# Altium PCB LaserPCBlayout.PcbDoc
Units mil, origin at the board's own origin, x right, y up, seen from the top; angles counter-clockwise.
Board outline 2362.2 x 3149.61 mil, 2 copper layers (Top Layer, Bottom Layer), stack 21 mil thick; 79 components, 72 nets, 325 pads, 211 vias.
Unrouted connection lines stored in the file: 73.
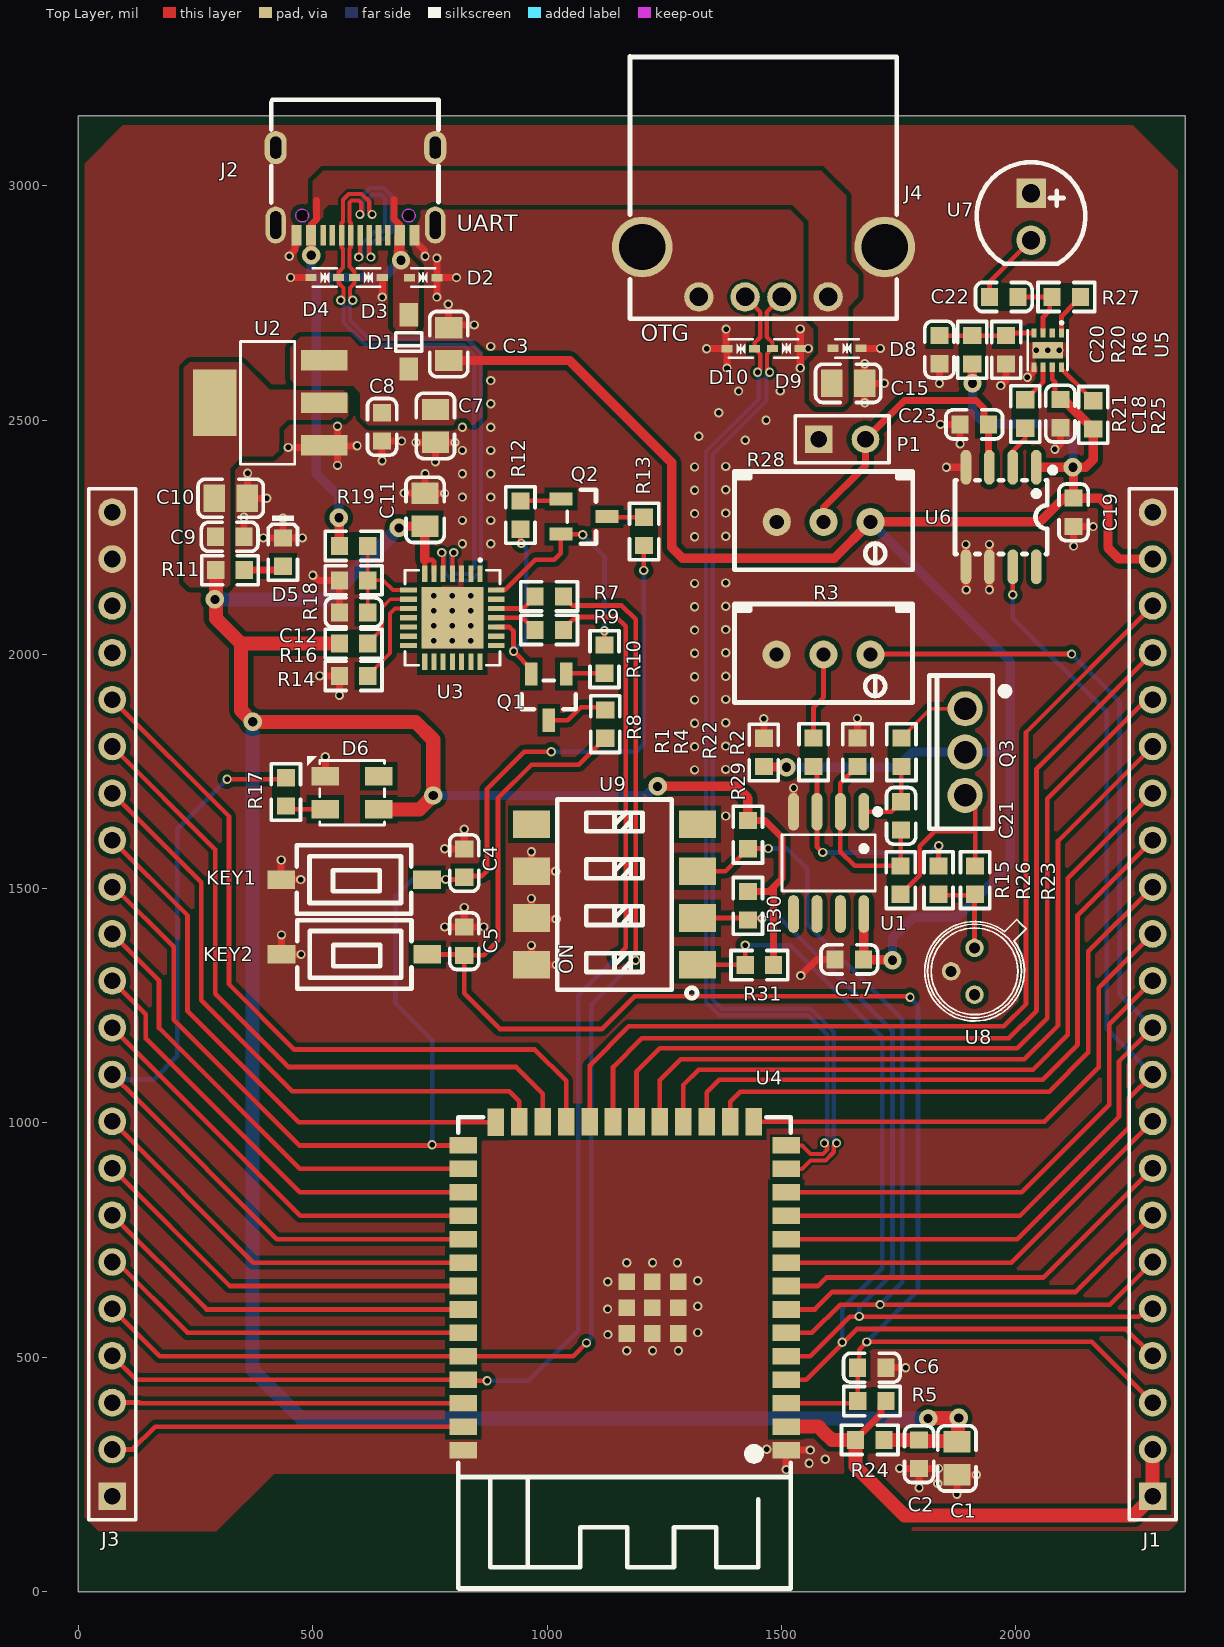
[diagram p0: Top Layer view]
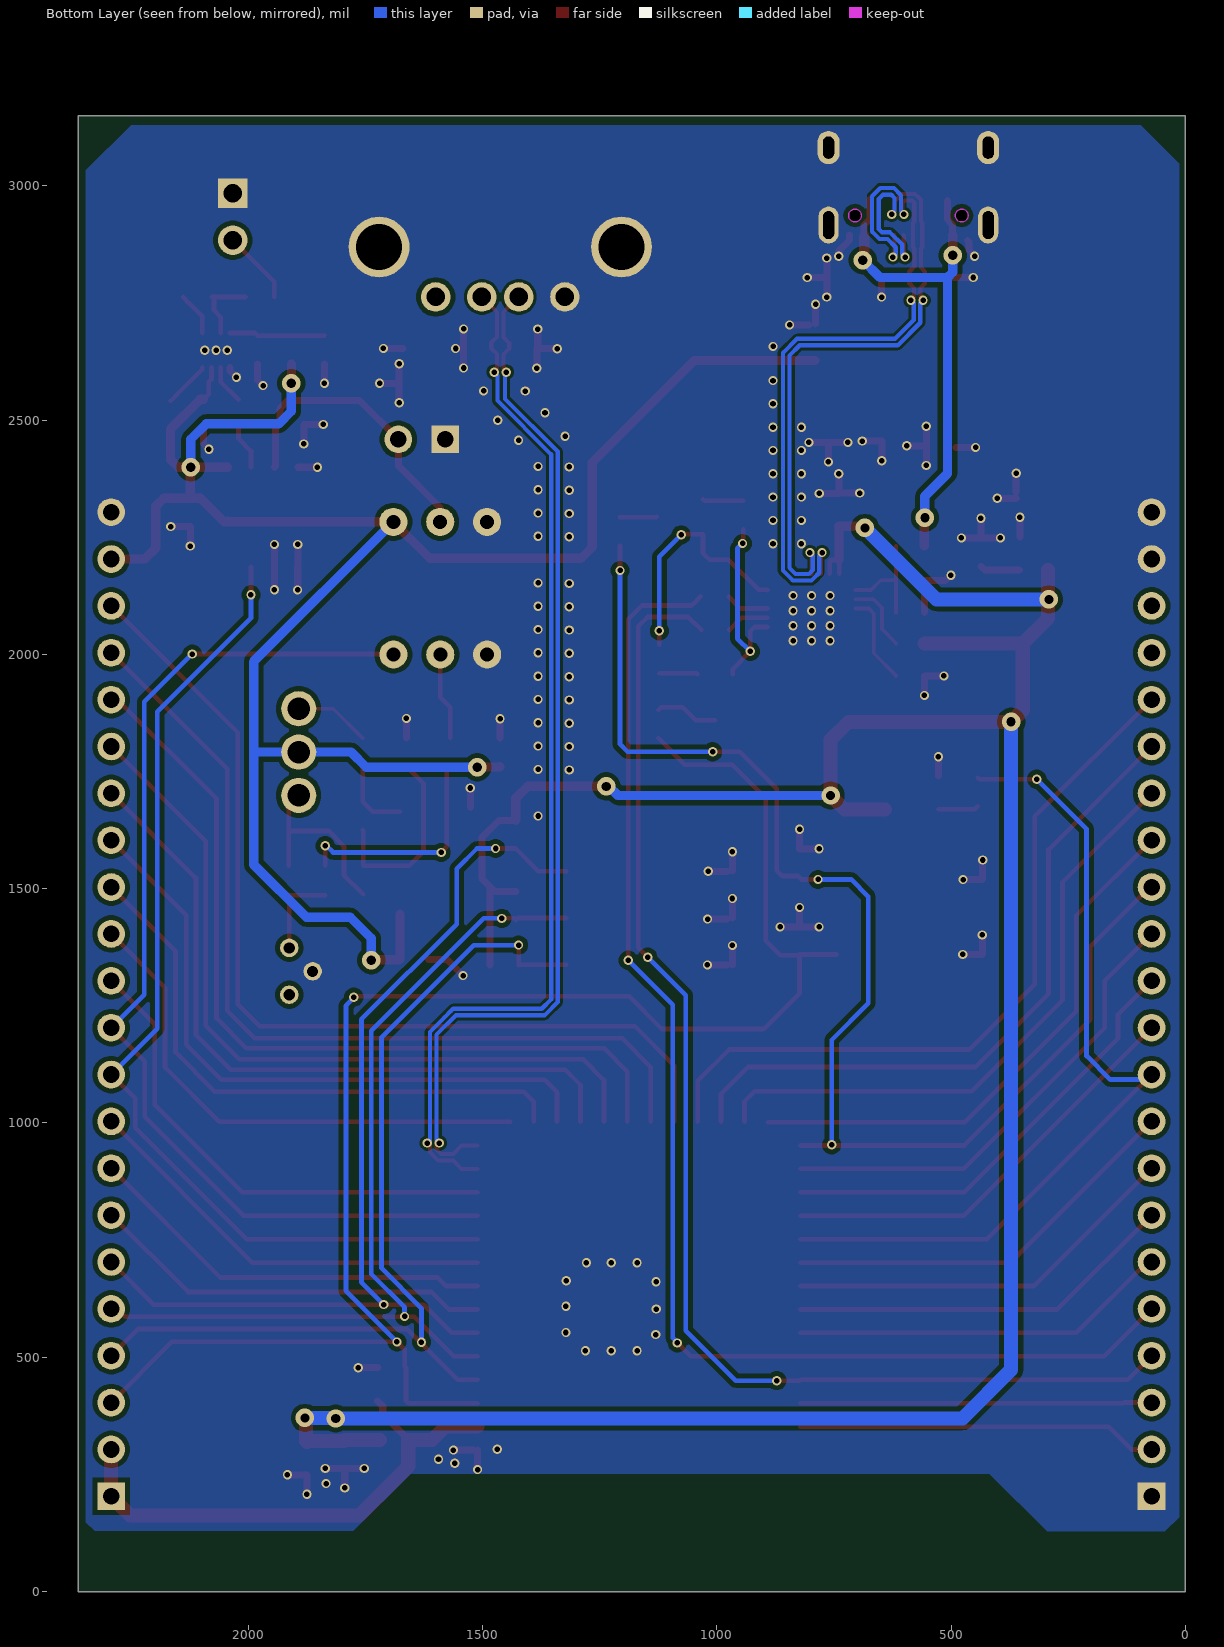
[diagram p1: Bottom Layer view, seen from below]
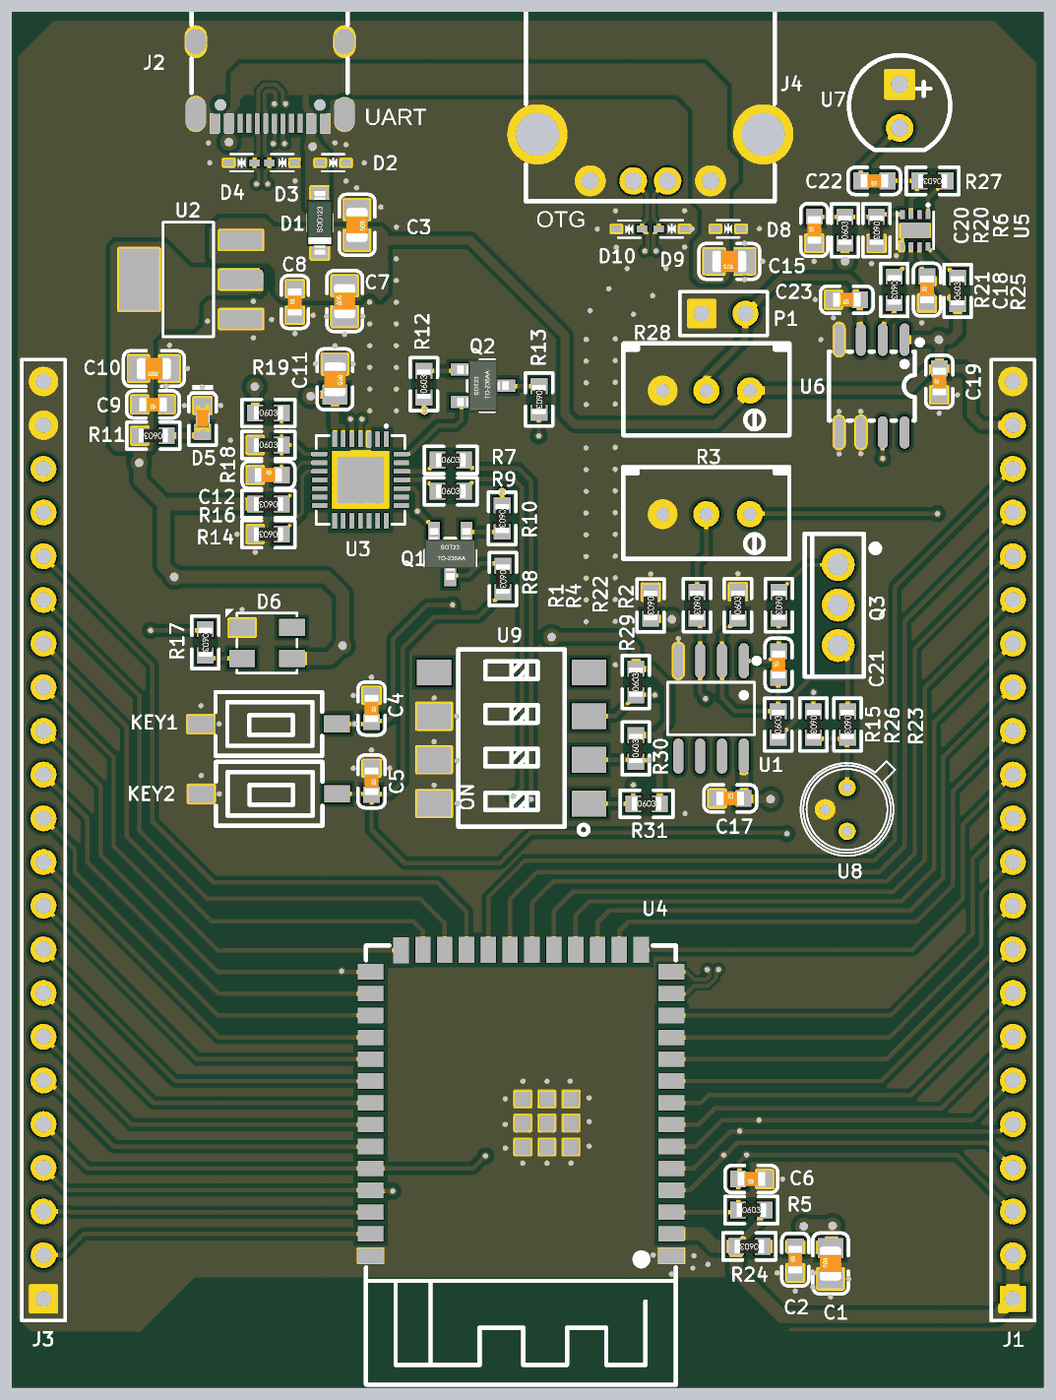
[diagram p2: 3D render of the assembled board from above, using the file's embedded part models]

## Layer stack, top to bottom
Top Solder: solder mask 0.4, Solder Resist, Dk 3.5
Top Layer: signal copper 1.4
Dielectric 2: prepreg 2.8, PP-006, Dk 4.1
Dielectric 1: dielectric 12.6, FR-4, Dk 4.8
Dielectric 3: prepreg 2.8, PP-006, Dk 4.1
Bottom Layer: signal copper 1.4
Bottom Solder: solder mask 0.4, Solder Resist, Dk 3.5

## Board outline
0,0 0,3149.61 2362.2,3149.61 2362.2,0

## Design rules (kind name [scope] priority, off if disabled: settings)
Clearance POLY [InPoly vs InNetClass('90OHM')] p1: gap=6 ignorepadtopadclearanceinfootprint=FALSE
Clearance POLY-ALL [InPoly] p2: gap=10 ignorepadtopadclearanceinfootprint=FALSE
Clearance [All] p3: gap=5 ignorepadtopadclearanceinfootprint=FALSE
ComponentClearance [All] p1: gap=0 collisioncheckmode=3 verticalgap=0 showdistances=FALSE
DiffPairsRouting [All] p1: maxlimit=5 minlimit=5 mostfreqgap=5 toplayer_minwidth=9 toplayer_maxwidth=9 toplayer_prefwidth=9 bottomlayer_minwidth=9 bottomlayer_maxwidth=9 bottomlayer_prefwidth=9 maxuncoupledlength=500
HoleSize [All] p1: absolutevalues=TRUE maxlimit=1000 minlimit=1 maxpercent=80.000 minpercent=20.000
HoleToHoleClearance [All] p1: gap=0 allowstackedmicrovias=TRUE
MinimumSolderMaskSliver [All] p1: minsoldermaskwidth=0
PlaneClearance [All] p1: clearance=15
PlaneConnect [All] p1: planeconnectstyle=Direct reliefexpansion=20 reliefentries=4 reliefconductorwidth=20 reliefairgap=10
PolygonConnect [All] p1: connectstyle=Direct reliefconductorwidth=20 reliefentries=4 polygonreliefangle="90 Angle" airgapwidth=10
RoutingVias [All] p1: holewidth=28 width=50 viastyle="Through Hole" minholewidth=28 minwidth=50 maxholewidth=28 maxwidth=50
SilkToSilkClearance [All] p1: silktosilkclearance=0
SilkToSolderMaskClearance [IsPad] p1: minsilkscreentomaskgap=0 clearancetoexposedcopper=TRUE
SolderMaskExpansion [All] p1: expansion=4 istentingtop=FALSE
SupplyNets "Schematic Supply Nets_12" [InNet('VBUS')] p1: voltage=0.000
SupplyNets "Schematic Supply Nets_11" [InNet('ESP_3V3')] p2: voltage=0.000
SupplyNets "Schematic Supply Nets_10" [InNet('VCC_3V3')] p3: voltage=0.000
SupplyNets "Schematic Supply Nets_9" [InNet('VCC_5V')] p4: voltage=0.000
SupplyNets "Schematic Supply Nets_4" [InNet('GND')] p5: voltage=0.000
Width [All] p1: maxlimit=1000 minlimit=6 preferedwidth=10
21 further rules are at their usual default settings.

## Classes and differential pairs
net class 90OHM: OTG_D_N OTG_D_P USB_D_N USB_D_P
differential pair class 90OHM: D_OTG_D_ D_USB_D_
differential pair D_USB_D_: +USB_D_P -USB_D_N
differential pair D_OTG_D_: +OTG_D_P -OTG_D_N
differential pair OTG_D: +OTG_D_P -OTG_D_N
differential pair USB_D: +USB_D_P -USB_D_N

## Components (designator, comment, footprint, x,y, rotation, side; value= is the part's Value field where it differs from the comment)
C1 "10uF/25V" 0805_C 1874.58,284.34 r90 top
C2 "0.1uF/50V" 0603_C 1793.89,293.22 r90 top
C3 "10uF/25V" 0805_C 790.33,2661.97 r270 top
C4 "0.1uF/50V" 0603_C 823.31,1554.61 r270 top
C5 "0.1uF/50V" 0603_C 823.31,1387.88 r270 top
C6 "1uF/16V" 0603_C 1693.06,477.72 r180 top
C7 "10uF/25V" 0805_C 761.8,2487.32 r90 top
C8 "0.1uF/50V" 0603_C 647.92,2485.26 r90 top
C9 "0.1uF/50V" 0603_C 322.78,2250.82 r180 top
C10 "10uF/25V" 0805_C 324.98,2332.96 r180 top
C11 "10uF/25V" 0805_C 739.63,2308.35 r270 top
C12 "1uF/16V" 0603_C 587.23,2089.42 r0 top
C15 "10uF/25V" 0805_C 1642.72,2578.3 r180 top
C17 "0.1uF/50V" 0603_C 1644.96,1349.03 r0 top
C18 "0.1uF/50V" 0603_C 2095.3,2513.65 r90 top
C19 "0.1uF/50V" 0603_C 2123.44,2302.92 r90 top
C20 "100pF/50V" 0603_C 1837.2,2650.22 r90 top
C21 "1pF/50V" 0603_C 1755.55,1655.26 r90 top
C22 "100pF/50V" 0603_C 1974.63,2762.47 r180 top
C23 "0.1uF/50V" 0603_C 1911.56,2490.53 r180 top
D1 "1N5819HW-7-F" SOD-123 704.93,2666.47 r90 top
D2 "LESD5D5.0CT1G-ES" SOD-523_L1.2-W0.8-LS1.6-BI 735.6,2803.93 r180 top
D3 "LESD5D5.0CT1G-ES" SOD-523_L1.2-W0.8-LS1.6-BI 618.91,2804.09 r180 top
D4 "LESD5D5.0CT1G-ES" SOD-523_L1.2-W0.8-LS1.6-BI 525.9,2804.09 r0 top
D5 "红灯 0603" 0603_LED_S1 436.35,2218.18 r270 top
D6 "SK6812MINI-HS" LED-SMD_4P-L3.5-W3.5-BR_SK6812MINI-HS 584.05,1704.55 r180 top
D8 "LESD5D5.0CT1G-ES" SOD-523_L1.2-W0.8-LS1.6-BI 1640.11,2652.78 r180 top
D9 "LESD5D5.0CT1G-ES" SOD-523_L1.2-W0.8-LS1.6-BI 1510.75,2652.69 r180 top
D10 "LESD5D5.0CT1G-ES" SOD-523_L1.2-W0.8-LS1.6-BI 1413.51,2652.23 r0 top
J1 "Header 22" HDR1X22 2292.19,203.33 r90 top
J2 "TYPE-C 16PIN 2MD(073)" USB-C-SMD_TYPE-C-6PIN-2MD-073 591.19,2987.73 r180 top locked
J3 "Header 22" HDR1X22 72.2,203.33 r90 top
J4 "USB-231-ARY" USB-A-TH_USB-231-ARY 1461.9,2815.87 r180 top locked
KEY1 "KEY" SW-smt 591.22,1516.27 r180 top
KEY2 "KEY" SW-smt 591.9,1356.38 r180 top
P1 "Header 2" HDR1X2 1579.51,2458.82 r0 top
Q1 "L8050QLT1G" SOT-23(SOT-23-3) 1003.66,1908.58 r90 top
Q2 "L8050QLT1G" SOT-23(SOT-23-3) 1078.72,2293.75 r180 top
Q3 "BD139" TO-126_L7.5-W2.5-P2.3-B 1892.04,1791.45 r180 top
R1 "330R" 0603_R 1462.52,1790.68 r270 top
R2 "68R" 0603_R 1756.01,1791.13 r270 top
R3 "1kΩ" RES-ADJ-TH_3296W 1589.97,1999.59 r270 top
R4 "100K/1%" 0603_R 1568.7,1791.13 r270 top
R5 "10K" 0603_R 1693.28,406.41 r0 top
R6 "13K/1%" 0603_R 1979.76,2649.65 r270 top
R7 "0R" 0603_R 1004.62,2123.51 r0 top
R8 "0R" 0603_R 1124.28,1851.12 r270 top
R9 "0R" 0603_R 1004.62,2052.01 r0 top
R10 "10K/1%" 0603_R 1122.57,1989.8 r270 top
R11 "5.1K" 0603_R 323.53,2179.55 r180 top
R12 "10K/1%" 0603_R 943.29,2297.15 r90 top
R13 "0R" 0603_R 1206.94,2262.22 r270 top
R14 "10K/1%/NC" 0603_R 587.23,1953.9 r180 top
R15 "10K/1%" 0603_R 1754.65,1518.2 r90 top
R16 "1K/1%" 0603_R 587.23,2022.7 r180 top
R17 "0R" 0603_R 442.84,1706.31 r270 top
R18 "47.5K/1%" 0603_R 587.23,2157.9 r0 top
R19 "22.1K/1%" 0603_R 587.23,2231.21 r0 top
R20 "43K/1%" 0603_R 1907.36,2649.65 r90 top
R21 "1K/1%" 0603_R 2020.44,2512.73 r270 top
R22 "100K/1%" 0603_R 1662.35,1791.13 r90 top
R23 "25R" 0603_R 1913.47,1518.2 r270 top
R24 "0R" 0603_R 1688.64,323.53 r180 top
R25 "10K/1%" 0603_R 2165.57,2510.9 r90 top
R26 "10K/1%" 0603_R 1835.27,1518.2 r270 top
R27 "10K/1%" 0603_R 2108.17,2762.43 r180 top
R28 "1kΩ" RES-ADJ-TH_3296W 1590.2,2282.63 r270 top
R29 "10K/1%" 0603_R 1428.6,1615.34 r90 top
R30 "10K/1%" 0603_R 1428.6,1463.42 r90 top
R31 "10K/1%" 0603_R 1453.16,1336.72 r0 top
U1 "OPA2350UA/2K5" SOIC-8_L4.9-W3.9-P1.27-LS6.0-BL 1600.95,1554.96 r180 top
U2 "SGM2212-3.3XKC3G/TR" SOT-223-3_L6.5-W3.4-P2.30-LS7.0-BR 407.79,2536.72 r0 top
U3 "CP2102N-A02-GQFN28R" QFN-28_L5.0-W5.0-P0.50-TL-EP3.3 798.03,2078.03 r270 top
U4 "ESP32-S3-WROOM-1-N16R8" WIRELM-SMD_ESP32-S3-WROOM-1 1165.83,652.23 r180 top locked
U5 "OPA855IDSGR" DFN-8_L2.0-W2.0-P0.50-BL-EP 2068.29,2649.03 r180 top
U6 "LT1016CS8#TRPBF" SO-8_L4.9-W3.9-P1.27-LS5.9-BL 1968.95,2292.91 r180 top
U7 "SFH 213" LED-TH_BD5.8-P2.54-RD 2032.73,2933.74 r270 top
U8 "OPV300" OPV300 1912.23,1324.14 r0 top
U9 "BX-DS2.54-4PTP" SW-SMD_8P-L10.3-W6.2-P2.54-LS9.5-BL 1143.88,1487.27 r90 top

## Footprints (in the part's own frame and the unit in brackets; to place one, negate y for a bottom-side part, rotate by r counter-clockwise, add the part's x,y. Pads: shape width x height; smd on the part's side, far side on the other; paste and mask are expansions set on the pad)
0603_C [mm]
  rect 0.93x0.98 smd: 1(-0.77,0) 2(0.77,0)
  silkscreen extent -1.53,-0.79 1.54,0.79, body extent -0.8,-0.4 0.8,0.4, height 0.3
0603_LED_S1 [mm]
  rect 0.93x0.98 smd: A(0.77,0) K(-0.77,0)
  silkscreen extent -1.98,-0.79 1.54,0.79, body extent -0.8,-0.4 0.8,0.4, height 0.6
0603_R [mm]
  rect 0.93x0.98 smd: 1(-0.77,0) 2(0.77,0)
  silkscreen extent -1.53,-0.79 1.54,0.79, body extent -0.85,-0.4 0.85,0.4, height 0.56
0805_C [mm]
  rect 1.16x1.47 smd: 1(-0.89,0) 2(0.89,0)
  silkscreen extent -1.77,-1.04 1.77,1.04, body extent -1,-0.62 1,0.63, height 0.77
DFN-8_L2.0-W2.0-P0.50-BL-EP [mm]
  rect 0.28x0.505 smd: 1(-0.75,-0.928) 2(-0.25,-0.928) 3(0.25,-0.928) 4(0.75,-0.928) 5(0.75,0.928) 6(0.25,0.928) 7(-0.25,0.928) 8(-0.75,0.928)
  rect 1.65x0.9 smd: 9(0,0)
  silkscreen extent -1.08,-1.55 1.08,1.08
HDR1X2 [mm] "Connector; Header; 2 Position"
  rect 1.5x1.5 hole 0.9: 1(0,0)
  round 1.5 hole 0.9: 2(2.54,0)
  silkscreen extent -1.27,-1.27 3.81,1.27
HDR1X22 [mm] "Connector; Header; 22 Position"
  rect 1.5x1.5 hole 0.9: 1(0,0)
  round 1.5 hole 0.9: 2(2.54,0) 3(5.08,0) 4(7.62,0) 5(10.16,0) 6(12.7,0) 7(15.24,0) 8(17.78,0) 9(20.32,0) 10(22.86,0) 11(25.4,0) 12(27.94,0) 13(30.48,0) 14(33.02,0) 15(35.56,0) 16(38.1,0) 17(40.64,0) 18(43.18,0) 19(45.72,0) 20(48.26,0) 21(50.8,0) 22(53.34,0)
  silkscreen extent -1.27,-1.27 54.61,1.27
LED-SMD_4P-L3.5-W3.5-BR_SK6812MINI-HS [mm]
  rect 1.5x1 smd: 1(1.45,-0.9) 2(1.45,0.9) 3(-1.45,0.9) 4(-1.45,-0.9)
  silkscreen extent -1.75,-1.97 2.42,1.75
LED-TH_BD5.8-P2.54-RD [mm]
  round 1.6 hole 1: 1(1.27,0)
  rect 1.6x1.6 hole 1: 2(-1.27,0)
  silkscreen extent -2.96,-2.95 2.54,2.94
OPV300 [mm]
  round 1 hole 0.6: 1(0,1.257) 2(-1.27,-0.013) 3(0,-1.283)
  silkscreen extent -2.7,-2.71 2.79,2.79
QFN-28_L5.0-W5.0-P0.50-TL-EP3.3 [mm]
  rect 0.905x0.28 smd paste-100 mask+0.051: 1(-2.377,1.5) 2(-2.377,1) 3(-2.377,0.5) 4(-2.377,0) 5(-2.377,-0.5) 6(-2.377,-1) 7(-2.377,-1.5) 15(2.377,-1.5) 16(2.377,-1) 17(2.377,-0.5) 18(2.377,0) 19(2.377,0.5) 20(2.377,1) 21(2.377,1.5)
  rect 0.28x0.905 smd paste-100 mask+0.051: 8(-1.5,-2.377) 9(-1,-2.377) 10(-0.5,-2.377) 11(0,-2.377) 12(0.5,-2.377) 13(1,-2.377) 14(1.5,-2.377) 22(1.5,2.377) 23(1,2.377) 24(0.5,2.377) 25(0,2.377) 26(-0.5,2.377) 27(-1,2.377) 28(-1.5,2.377)
  rect 3.35x3.35 smd paste-100 mask+0.051: 29(0,0)
  silkscreen extent -3.2,-2.58 2.58,2.58
RES-ADJ-TH_3296W [mil]
  round 60 hole 30: 1(0,100.01) 2(0,0.01) 3(0,-99.99)
  silkscreen extent -108,-190 102,190
SO-8_L4.9-W3.9-P1.27-LS5.9-BL [mil]
  oval 22.6x74.33 smd: 1(-75,-106.26) 2(-25,-106.26) 3(25,-106.26) 4(75,-106.26) 5(75,106.26) 6(25,106.26) 7(-25,106.26) 8(-75,106.26)
  silkscreen extent -116,-106 98,79
SOD-123 [mm]
  rect 1.25x1 smd: 1(1.475,0) 2(-1.475,0)
  silkscreen extent -0.5,-0.7 0.5,0.7, body extent -1.85,-0.77 1.85,0.78, height 1.35
SOD-523_L1.2-W0.8-LS1.6-BI [mm]
  rect 0.6x0.4 smd: 1(-0.75,0) 2(0.75,0)
  silkscreen extent -0.65,-0.5 0.65,0.5
SOIC-8_L4.9-W3.9-P1.27-LS6.0-BL [mm]
  oval 0.588x2.045 smd: 1(-1.905,-2.772) 2(-0.635,-2.772) 3(0.635,-2.772) 4(1.905,-2.772) 5(1.905,2.772) 6(0.635,2.772) 7(-0.635,2.772) 8(-1.905,2.772)
  silkscreen extent -2.8,-2.92 2.53,1.52
SOT-23(SOT-23-3) [mm]
  rect 1.25x0.7 smd: 1(1.25,-0.95) 2(1.25,0.95) 3(-1.25,0)
  silkscreen extent -0.65,-1.46 0.9,1.46, body extent -1.5,-1.5 1.5,1.5, height 1.3
SOT-223-3_L6.5-W3.4-P2.30-LS7.0-BR [mm]
  rect 2.5x1.1 smd: 1(2.97,-2.3) 2(2.97,0) 3(2.97,2.3)
  rect 2.34x3.6 smd: 4(-2.97,0)
  silkscreen extent -1.57,-3.33 1.37,3.33
SW-SMD_8P-L10.3-W6.2-P2.54-LS9.5-BL [mm]
  rect 1.5x2 smd: 1(-3.81,-4.5) 2(-1.27,-4.5) 3(1.27,-4.5) 4(3.81,-4.5) 5(3.81,4.5) 6(1.27,4.5) 7(-1.27,4.5) 8(-3.81,4.5)
  silkscreen extent -5.62,-4.47 5.15,3.1
SW-smt [mm] "TS-1007S-26"
  rect 1.5x1 smd: 1(-3.873,-0.08) 2(4.027,-0.08)
  silkscreen extent -3.02,-1.93 3.18,1.77
TO-126_L7.5-W2.5-P2.3-B [mil]
  round 75 hole 48: 1(0,-92.52) 2(0,0) 3(0,92.52)
  silkscreen extent -93,-163 77,163
USB-A-TH_USB-231-ARY [mm]
  round 1.6 hole 1: 1(-3.5,1.355) 2(-1,1.355) 3(1,1.355) 4(3.5,1.355)
  round 3.3 hole 2.5: 5(-6.57,-1.355) 6(6.57,-1.355)
  silkscreen extent -7.23,-11.68 7.24,2.54
USB-C-SMD_TYPE-C-6PIN-2MD-073 [mm]
  rect 0.55x1.1 smd paste-100 mask+0.05: 1(-3.2,2.375) 2(-2.4,2.375) 11(2.4,2.375) 12(3.2,2.375)
  rect 0.3x1.1 smd paste-100 mask+0.05: 3(-1.75,2.375) 4(-1.25,2.375) 5(-0.75,2.375) 6(-0.25,2.375) 7(0.25,2.375) 8(0.75,2.375) 9(1.25,2.375) 10(1.75,2.375)
  oval 1.2x1.8 hole 0.6 slot 1.2 at 90 deg paste-2539.97 mask+0.05: 13(-4.325,-2.375) 14(4.325,-2.375)
  oval 1.1x2 hole 0.6 slot 1.5 at 90 deg paste-2539.97 mask+0.05: 13(-4.325,1.825) 14(4.325,1.825)
  Keep-Out Layer board cut-out: -2.54,1.305 -2.575,1.153 -2.672,1.031 -2.812,0.964 -2.968,0.964 -3.108,1.031 -3.205,1.153 -3.24,1.305 -3.24,1.305 -3.205,1.457 -3.108,1.579 -2.968,1.646 -2.812,1.646 -2.672,1.579 -2.575,1.457 -2.54,1.305
  Keep-Out Layer board cut-out: 3.24,1.305 3.205,1.153 3.108,1.031 2.968,0.964 2.812,0.964 2.672,1.031 2.575,1.153 2.54,1.305 2.54,1.305 2.575,1.457 2.672,1.579 2.812,1.646 2.968,1.646 3.108,1.579 3.205,1.457 3.24,1.305
  Keep-Out Layer circle w0.025: c-2.89,1.305 r0.35
  Keep-Out Layer circle w0.025: c2.89,1.305 r0.35
  Keep-Out Layer region: -2.54,1.305 -2.575,1.153 -2.672,1.031 -2.812,0.964 -2.968,0.964 -3.108,1.031 -3.205,1.153 -3.24,1.305 -3.24,1.305 -3.205,1.457 -3.108,1.579 -2.968,1.646 -2.812,1.646 -2.672,1.579 -2.575,1.457 -2.54,1.305
  Keep-Out Layer region: 3.24,1.305 3.205,1.153 3.108,1.031 2.968,0.964 2.812,0.964 2.672,1.031 2.575,1.153 2.54,1.305 2.54,1.305 2.575,1.457 2.672,1.579 2.812,1.646 2.968,1.646 3.108,1.579 3.205,1.457 3.24,1.305
  silkscreen extent -4.5,-4.97 4.57,0.6
WIRELM-SMD_ESP32-S3-WROOM-1 [mm]
  rect 1.5x0.9 smd paste+0 mask+0.05: 1(-8.75,8.895) 2(-8.75,7.625) 3(-8.75,6.355) 4(-8.75,5.085) 5(-8.75,3.815) 6(-8.75,2.545) 7(-8.75,1.275) 8(-8.75,0.005) 9(-8.75,-1.265) 10(-8.75,-2.535) 11(-8.75,-3.805) 12(-8.75,-5.075) 13(-8.75,-6.345) 14(-8.75,-7.615) 27(8.75,-7.615) 28(8.75,-6.345) 29(8.75,-5.075) 30(8.75,-3.805) 31(8.75,-2.535) 32(8.75,-1.265) 33(8.75,0.005) 34(8.75,1.275) 35(8.75,2.545) 36(8.75,3.815) 37(8.75,5.085) 38(8.75,6.355) 39(8.75,7.625) 40(8.75,8.895)
  rect 0.9x1.5 smd paste+0 mask+0.05: 15(-6.985,-8.895) 16(-5.715,-8.895) 17(-4.445,-8.895) 18(-3.175,-8.895) 19(-1.905,-8.895) 20(-0.635,-8.895) 21(0.635,-8.895) 22(1.905,-8.895) 23(3.175,-8.895) 24(4.445,-8.895) 25(5.715,-8.895) 26(6.985,-8.865)
  rect 0.9x0.9 smd: 41(-2.9,2.575) 41(-2.9,-0.225) 41(-2.9,1.175) 41(-1.5,2.575) 41(-1.5,1.175) 41(-1.5,-0.225) 41(-0.1,2.575) 41(-0.1,1.175) 41(-0.1,-0.225)
  silkscreen extent -9,-9.14 9.02,16.39

## Part data
C1 C3 C7 C10 C11 C15: library part "0805 2.0pF (2R0) 0.25pF 50V", "贴片电容", Package=0805, SuppliersPartNumber=C1800, ComponentLink1Description=供应商链接, ComponentLink1URL=http://www.szlcsc.com/product/details_2152.html, Supplier=LC
C2 C4 C5 C6 C8 C9 C12 C17 C18 C19 C20 C21 C22 C23: library part "0603 8.2nF (822) 10% 50V", "贴片电容", Package=0603, SuppliersPartNumber=C27920, ComponentLink1Description=供应商链接, ComponentLink1URL=http://www.szlcsc.com/product/details_28670.html, Supplier=LC
D1: library part 1SS314, "射频开关二极管"
D2 D3 D4 D8 D9 D10: Breakdown Voltage=5.8V, JLCPCB Part Class="Extended Part", LCSC Part Name=普容5.0V，单路双向ESD静电防护器件，30kV，CJ：12pF；音频/视频/通讯防护, Manufacturer=ElecSuper(静芯微), Maximum Clamping Voltage=10V, Operating Temperature=-, Peak Pulse Current (Ipp)=8A, Peak Pulse Power Dissipation (Ppp)=80W, Reverse Leakage Current (Ir)=1uA, Reverse Stand-Off Voltage (Vrwm)=5V, Add into BOM=yes, Convert to PCB=yes, Datasheet=https://atta.szlcsc.com/upload/public/pdf/source/20240905/10776531C4DE5F6ADA679023752259EC.pdf, Device=LESD5D5.0CT1G-ES, Manufacturer Part=LESD5D5.0CT1G-ES, Number of Lines=单路, polarity=双向, Supplier=LCSC, Supplier Footprint=SOD523, Supplier Part=C5199159, Symbol=LESD5D5.0CT1G-ES, Type=ESD
D5: library part "0603 红灯", "发光二极管", Package=0603, SuppliersPartNumber=C2286, ComponentLink1Description=供应商链接, ComponentLink1URL=http://www.szlcsc.com/product/details_2659.html, Supplier=LC
D6: ESD Withstand Voltage=2000V, Fixed-Frequency Pwm Mode=1kHz, JLCPCB Part Class="Extended Part", Lens Color=半透明透镜, Manufacturer=欧思科光电, Operating Temperature=-40℃~+85℃, Quiescent Current=0.6mA, Voltage - Supply=3.7V~5.5V, Add into BOM=yes, Convert to PCB=yes, Data Transmission Rate=800Kbit/s, Datasheet=https://item.szlcsc.com/datasheet/SK6812MINI-HS/3234155.html, Device=SK6812MINI-HS, Height=3.5mm, LCSC Part Name=SK6812MINI-HS, Length=3.7mm, Luminous Intensity=R:200mcd~385mcd；B:160mcd~320mcd；G:815mcd~1275mcd, Manufacturer Part=SK6812MINI-HS, Supplier=LCSC, Supplier Footprint=SMD,3.5x3.7mm, Supplier Part=C2922787, Symbol=SK6812MINI-HS, Viewing Angle=120°, Wavelength=R:620nm~625nm；B:465nm~475nm；G:520nm~530nm, Width=1.95mm
J1 J3: "Header, 22-Pin", LatestRevisionDate=17-Jul-2002, LatestRevisionNote="Re-released for DXP Platform.", Publisher="Altium Limited"
J2: Current Rating-Power=3A, Detection color=黑色, JLCPCB Part Class="Extended Part", LCSC Part Name="Type-C 母 卧贴", Manufacturer="SHOU HAN(首韩)", Operating Temperature=-25℃~+85℃, Voltage Rating=5V, Add into BOM=yes, Center Height=-, Connect-Disconnect Life=5千次, Connector Type=Type-C, Convert to PCB=yes, Datasheet=https://item.szlcsc.com/datasheet/TYPE-C%252016PIN%25202MD(073)/2901843.html, Device="TYPE-C 16PIN 2MD(073)", Gender=母, Length=-, Manufacturer Part="TYPE-C 16PIN 2MD(073)", Mounting Type=卧贴, Number of Contacts=16P, Number of Ports=1, Protocol Standard=-, Supplementary Features=-, Supplier=LCSC, Supplier Footprint=SMD, Supplier Part=C2765186, Symbol="TYPE-C 16PIN 2MD(073)"
J4: Current Rating-Power=1.5A, Detection color=白色, JLCPCB Part Class="Extended Part", LCSC Part Name="Type-A 母 弯插", Manufacturer=XUNPU(讯普), Operating Temperature=-20℃~+70℃, Voltage Rating=30V, Add into BOM=yes, Connector Type=Type-A, Convert to PCB=yes, Datasheet=https://item.szlcsc.com/datasheet/USB-231-ARY/763532.html, Device=USB-231-ARY, Gender=母, Length=14.2mm, Manufacturer Part=USB-231-ARY, Mounting Type=弯插, Number of Contacts=4P, Number of Ports=1, Protocol Standard="USB 2.0", Supplier=LCSC, Supplier Footprint=弯插, Supplier Part=C720525, Symbol=USB-231-ARY
KEY1 KEY2: library part keysmt
P1: "Header, 2-Pin", LatestRevisionDate=17-Jul-2002, LatestRevisionNote="Re-released for DXP Platform.", Publisher="Altium Limited"
Q1 Q2: library part "SOT-23 MMBT5551  G1", "三极管", Package=SOT-23, SuppliersPartNumber=C2145, ComponentLink1Description=供应商链接, ComponentLink1URL=http://www.szlcsc.com/product/details_2502.html, Supplier=LC
Q3: Collector - Emitter Voltage VCEO=80V, Current - Collector Cutoff=10uA, Current - Collector(Ic)=1.5A, DC Current Gain=63@150mA,2V, Emitter-Base Voltage(Vebo)=5V, JLCPCB Part Class="Extended Part", LCSC Part Name="NPN 电流:1.5A 电压:80V", Manufacturer=ST(意法半导体), Operating Temperature=-65℃~+150℃, Pd - Power Dissipation=12.5W, Add into BOM=yes, Convert to PCB=yes, Datasheet=https://item.szlcsc.com/datasheet/BD139/28616.html, Device=BD139, Manufacturer Part=BD139, Number=1个NPN, Supplier=LCSC, Supplier Footprint=TO-126, Supplier Part=C27866, Symbol=BD139, Type=NPN, Vce Saturation(VCE(sat))=500mV@0.5A,0.05A
R1 R2 R4 R5 R6 R7 R8 R9 R10 R11 R12 R13 R14 R15 R16 R17 R18 R19 R20 R21 R22 R23 R24 R25 R26 R27 R29 R30 R31: library part "0603 1KΩ (1001) 1%", "贴片电阻", Package=0603, SuppliersPartNumber=C21190, ComponentLink1Description=供应商链接, ComponentLink1URL=http://www.szlcsc.com/product/details_21904.html, Supplier=LC
R3 R28: library part 3296W-1-102LF, JLCPCB Part Class="Extended Part", LCSC Part Name="1kΩ ±10%", Manufacturer=BOURNS, Power(Watts)=500mW, Temperature Coefficient=±100ppm/℃, Tolerance=±10%, Add into BOM=yes, Convert to PCB=yes, Datasheet=https://item.szlcsc.com/datasheet/3296W-1-102LF/58119.html, Device=3296W-1-102LF, Manufacturer Part=3296W-1-102LF, Number of Turns=25, Supplier=LCSC, Supplier Footprint=SIP-3P,9.5x4.8mm, Supplier Part=C57089, Symbol=3296W-1-102LF
U1: Ib - Input Bias Current=0.5pA, JLCPCB Part Class="Extended Part", Manufacturer=TI(德州仪器), Operating Temperature=-40℃~+85℃, Output Current=40mA, Quiescent Current per Amplifier=5.2mA, Voltage - Supply=2.5V~5.5V, Add into BOM=yes, Convert to PCB=yes, Datasheet=https://www.ti.com/cn/lit/gpn/opa2350, Device=OPA2350UA/2K5, Gain Bandwidth Product=38MHz, LCSC Part Name=OPA2350UA/2K5, Manufacturer Part=OPA2350UA/2K5, Number of Channels=双路, Output Type=-, Rail to Rail=-, Slew Rate=22V/us, Supplier=LCSC, Supplier Footprint=SOIC-8, Supplier Part=C55904, Symbol=OPA2350UA/2K5
U2: library part SGM2212-3.3XKC3G/TR_C3294699, JLCPCB Part Class="Extended Part", Manufacturer=SGMICRO(圣邦微), Operating Temperature=-40℃~+125℃, Output Current=800mA, Output Voltage=3.3V, Power Supply Rejection Ratio (PSRR)=80dB@(120Hz), standby current=80uA, Voltage - Supply=20V, Voltage Dropout=450mV@(800mA), Add into BOM=yes, Convert to PCB=yes, Datasheet=https://item.szlcsc.com/datasheet/SGM2212-3.3XKC3G%252FTR/3859121.html, Device=SGM2212-3.3XKC3G/TR_C3294699, Features=短路保护；热关断, LCSC Part Name=SGM2212-3.3XKC3G/TR, Manufacturer Part=SGM2212-3.3XKC3G/TR, Noise=0.002%Vout, Output Type=固定, Supplier=LCSC, Supplier Footprint=SOT-223-3, Supplier Part=C3294699, Symbol=SGM2212-3.3XKC3G/TR_C3294699
U3: Current - Supply=9.5mA, JLCPCB Part Class="Extended Part", Manufacturer="SKYWORKS/SILICON LABS(芯科)", Operating Temperature=-40℃~+85℃@(Ta), Supply Current (Iq)=1.3uA, Voltage - Supply=3V~3.6V, Add into BOM=yes, Applications Function=USB转UART, Convert to PCB=yes, Datasheet=https://item.szlcsc.com/datasheet/CP2102N-A02-GQFN28R/1049893.html, Device=CP2102N-A02-GQFN28R, LCSC Part Name=CP2102N-A02-GQFN28R, Manufacturer Part=CP2102N-A02-GQFN28R, Supplier=LCSC, Supplier Footprint=QFN-28-EP(5x5), Supplier Part=C964632, Symbol=CP2102N-A02-GQFN28R, USB Protocol="USB 2.0"
U4: JLCPCB Part Class="Extended Part", LCSC Part Name=通用型Wi-Fi+低功耗蓝牙MCU模组, Manufacturer=ESPRESSIF(乐鑫), Add into BOM=yes, Convert to PCB=yes, Datasheet=https://item.szlcsc.com/datasheet/ESP32-S3-WROOM-1-N16R8/3198300.html, Device=ESP32-S3-WROOM-1-N16R8, Manufacturer Part=ESP32-S3-WROOM-1-N16R8, Supplier=LCSC, Supplier Footprint=SMD,18x25.5mm, Supplier Part=C2913202, Symbol=ESP32-S3-WROOM-1(N16R8)
U5: Ib - Input Bias Current=18.5uA, Input offset current drift(Ios TC)=-, Input Offset Current(Ios)=100nA, Input Offset Voltage Drift(Vos TC)=1.5uV/℃, JLCPCB Part Class="Extended Part", LCSC Part Name=8GHz增益带宽积、7VV稳定增益、双极输入放大器, Manufacturer=TI(德州仪器), Maximum Power Supply Range (Vdd-Vss)=5.25V, Operating Temperature=-40℃~+125℃, Output Current=105mA, Quiescent Current=17.8mA, Vos - Input Offset Voltage=200uV, Add into BOM=yes, Common Mode Rejection Ratio(CMRR)=100dB, Convert to PCB=yes, Datasheet=https://www.ti.com/cn/lit/gpn/opa855, Device=OPA855IDSGR, Dual Supply=-, Gain Bandwidth Product=8GHz, Manufacturer Part=OPA855IDSGR, Noise density(eN)=980pV/√Hz@1kHz, Number of Channels=单路, Rail to Rail=-, Single supply=3.3V~5.25V, Slew Rate=2.75V/ns, Supplier=LCSC, Supplier Footprint=WSON-8-EP(2x2), Supplier Part=C1409030, Symbol=OPA855IDSGR
U6: Ib - Input Bias Current=-, JLCPCB Part Class="Extended Part", LCSC Part Name="超快精准 10ns 比较器", Manufacturer=ADI(亚德诺), Operating Temperature=0℃~+70℃, Vos - Input Offset Voltage=3mV, Add into BOM=yes, Common Mode Rejection Ratio(CMRR)=96dB, Convert to PCB=yes, Datasheet=https://atta.szlcsc.com/upload/public/pdf/source/20200628/C661960_9C87D689D7FCCFB056AF2682BEAB8545.pdf, Device=LT1016CS8#TRPBF, Input Hysteresis Voltage (Vhys)=-, Manufacturer Part=LT1016CS8#TRPBF, Output Type=TTL；CMOS, Supplier=LCSC, Supplier Footprint=SO-8, Supplier Part=C661508, Symbol=LT1016CS8#TRPBF
U7: Current Dark=1nA, DC Reverse Voltage=50V, JLCPCB Part Class="Extended Part", LCSC Part Name=光电二极管, Manufacturer=OSRAM(欧司朗), Operating Temperature=-40℃~+100℃, Add into BOM=yes, Convert to PCB=yes, Device="SFH 213", Manufacturer Part="SFH 213", Peak  Wavelength=850nm, Reception Angle=-, Spectral Range=400nm~1100nm, Supplier=LCSC, Supplier Footprint=插件, Supplier Part=C2900210, Symbol="SFH 213"
U9: Color=黑色, Current Rating=25mA, JLCPCB Part Class="Extended Part", LCSC Part Name="DSIC 2.54贴片高推4位 间距2.54mm 平拨 凹槽式 4位拨码开关", Manufacturer=Bossie(博锡), Operating Life=3千次, Operating Temperature=-30℃~+85℃, Voltage Rating=24V, Add into BOM=yes, Circuit=单刀单掷, Convert to PCB=yes, Datasheet=https://item.szlcsc.com/datasheet/BX-DS2.54-4PTP/19218645.html, Device=BX-DS2.54-4PTP, Lead Pitch=2.54mm, Manufacturer Part=BX-DS2.54-4PTP, Number of Positions=4位, Supplier=LCSC, Supplier Footprint=SMD,P=2.54mm, Supplier Part=C18078244, Symbol=BX-DS2.54-4PTP, Termination Style=-, Type=平拨,凹槽式

## Via types
v1: diameter 19.68, hole 11.81, Top Layer to Bottom Layer, tented both sides, 194 vias
v2: diameter 39.37, hole 19.68, Top Layer to Bottom Layer, tented both sides, 14 vias
v3: diameter 19.68, hole 11.81, Top Layer to Bottom Layer, 3 vias

## Nets (pads, with @x,y where several pads share a name; then routed paths per layer and width w, separated by ;. In a path a pad name is that pad's centre, name@x,y a point inside that pad or via, vN(x,y) a via of type N, cw(c..) or ccw(c..) an arc to the next point about the centre after c; other vN are vias at no path point)
CHIP_PU: C5.2 C6.2 J1.3 KEY2.1 R5.1 R8.2 U4.3 | length 3579.3
  Top Layer w10: KEY2.1 C5.2@823.31,1359.55 ; C5.2 823.31,1276.77 899.75,1200.33 1116.87,1200.33 1186.77,1270.24 1772.8,1270.24 v1(1774.59,1268.45) ; C5.2@827.51,1358.05 864.54,1358.05 895.3,1388.81 895.3,1693.01 966.86,1764.57 1068.04,1764.57 R8.2 ; U4.3 1658.59,402.03 R5.1 1662.97,477.49 C6.2 1665.91,480.88 1665.91,516.33 v1(1682.41,532.83) 2162.68,532.83 J1.3
  Bottom Layer w10: v1(1682.41,532.83) 1791.39,641.81 1791.39,1250.12 1774.59,1266.92 v1(1774.59,1268.45)
DTR: Q2.2 R10.1 U3.28 | length 512.1
  Top Layer w10: U3.28 892.14,2137.59 910.75,2137.59 975.28,2202.12 1015.58,2202.12 1029.5,2216.05 Q2.2 1074.66,2256.35 v3(1075.99,2255.02) ; R10.1 v3(1122.57,2050.24)
  Bottom Layer w10: v3(1075.99,2255.02) 1122.57,2208.43 v3(1122.57,2050.24)
ESP_3V3: J1.1 J1.2 R5.2 R24.2 U4.2 | length 1120
  Top Layer w15: R24.2 1658.32,324.52 1712.79,378.99 1712.79,395.6 R5.2
  Top Layer w30: U4.2 1579.19,352.03 1591.38,339.84 1607.69,323.53 R24.2 1658.32,267.32 1762.98,162.65 2251.52,162.65 J1.1 J1.2
GND: C1.1 C2.1 C3.1 C4.1 C5.1 C6.1 C7.1 C8.1 C9.1 C10.1 C11.1 C12.1 C15.1 C17.1 C18.1 C19.1 C20.1 C23.2 D2.1 D3.1 D4.1 D5.K D6.1 D8.1 D9.1 D10.1 J1.22 J2.1 J2.12 J2.13 J2.14 J3.1 J3.21 J3.22 J4.4 J4.5 J4.6 KEY1.2 KEY2.2 P1.1 R1.1 R3.3 R6.2 R14.2 R18.1 R22.2 R28.3 U1.4 U2.1 U3.3 U3.29 U4.1 U4.40 U4.41 U5.5 U5.9 U6.4 U6.5 U6.6 U7.2 U8.2 U9.6 U9.7 U9.8 | length 3520.4
  Top Layer w15: C9.1 v1(353.1,2292.51) ; C10.1 v1(401.71,2332.96) ; C10.1@361.1,2344.88 v1(361.1,2386.56) ; v1(394.66,2248.5) D5.K ; v1(432.67,1561.13) KEY1.2 v1(474.36,1519.44) ; v1(433.35,1401.23) KEY2.2 v1(475.04,1359.55) ; v1(436.35,2290.18) D5.K ; v1(447.65,2441.57) U2.1@489.34,2441.57 ; v1(450.01,2849.33) 450.01,2850.59 461.88,2862.46 461.88,2880.1 J2.12@465.21,2883.43 ; v1(452.71,2804.09) D4.1@494.4,2804.09 ; v1(478.04,2248.5) D5.K ; v1(500.41,2168.69) 501.68,2168.69 512.47,2157.9 R18.1 C12.1 ; v1(515.22,1953.9) R14.2 v1(556.91,1912.21) ; D6.1 v1(526.96,1781.67) ; v1(552.85,2403.16) U2.1@552.85,2444.85 ; v1(552.85,2486.54) U2.1@552.85,2444.85 ; v1(594.54,2444.85) U2.1@552.85,2444.85 ; v1(647.92,2413.26) C8.1 v1(689.6,2454.95) ; v1(648.44,2762.4) D3.1 ; v1(695.13,2344.06) C11.1@736.82,2344.06 ; J2.1 717.18,2883.4 738.76,2861.81 738.76,2850.55 v1(739.66,2849.66) ; v1(720.11,2452.28) C7.1 ; v1(739.63,2385.08) C11.1 v1(781.32,2343.39) ; v1(761.8,2410.59) C7.1 ; v1(765.12,2762.24) D2.1 ; v1(765.12,2845.62) D2.1 ; v1(781.62,1418.19) C5.1 ; v1(781.62,1584.93) C4.1 v1(823.31,1626.61) ; C3.1@789.25,2705.17 v1(789.25,2746.86) ; C3.1@802.9,2702.84 v1(844.59,2702.84) ; v1(803.49,2452.28) C7.1 ; v1(806.81,2803.93) D2.1 ; v1(823.31,1459.88) C5.1 ; v1(865,1418.19) C5.1 ; U9.8 v1(966.72,1378.96) ; U9.7 v1(966.72,1478.96) ; U9.6 v1(966.72,1578.96) ; U9.6@976.67,1536.97 v1(1018.35,1536.97) ; U9.7@977.86,1435.11 v1(1019.55,1435.11) ; U9.8@978.26,1337.23 v1(1019.95,1337.23) ; v1(1340.32,2652.23) 1382.01,2652.23 v1(1382.01,2693.92) ; v1(1383.98,2610.54) D10.1 ; R1.1 v1(1462.52,1862.68) ; v1(1510.32,260.34) U4.1 ; U4.1@1520.16,302.03 v1(1561.85,302.03) ; U1.4@1525.95,1673.07 v1(1525.95,1714.76) ; v1(1540.28,2611) D9.1 ; v1(1540.28,2694.38) D9.1 ; v1(1541.24,1314.5) 1575.77,1349.03 C17.1 ; v1(1557.3,2652.6) 1557.26,2652.64 D9.1 D9.1 ; R22.2 v1(1662.35,1863.13) ; D8.1 v1(1711.32,2652.78) ; v1(1677.75,2536.61) C15.1 ; v1(1677.75,2619.99) C15.1 ; v1(1719.44,2578.3) C15.1 ; C6.1 v1(1765.06,477.72) ; v1(1752.2,262.9) C2.1 ; v1(1793.89,221.21) C2.1 ; v1(1835.58,262.9) C2.1 ; v1(1837.2,2578.21) C20.1 ; v1(1839.56,2490.53) C23.2 v1(1881.24,2448.84) ; v1(1852.26,2399.17) U6.4 ; v1(1874.58,207.61) C1.1 v1(1916.27,249.3) ; U6.5 1894.17,2186.44 1894.17,2137.71 v1(1894.39,2137.49) ; U6.5@1893.95,2192.91 v1(1893.95,2234.6) ; v1(1943.95,2137.98) U6.6@1943.95,2192.52 ; U6.6@1943.95,2192.91 v1(1943.95,2234.6) ; v1(1968.2,2573.56) 1979.76,2585.12 R6.2 ; v1(2025.07,2591.39) 2038.76,2605.08 U5.5 ; v1(2083.68,2437.46) 2095.3,2449.08 C18.1 ; v1(2123.44,2230.91) C19.1 v1(2165.13,2272.6)
  other v1: 1833.83,230.4 1559.19,273.74 1593.8,282.27 1468.63,303.61 1170.05,513.92 1225.2,513.92 1280.34,513.92 1130.01,548.34 1321.79,552.91 1129.3,602.79 1321.79,609.11 1129.65,661.1 1321.44,663.2 1170.05,701.49 1225.2,701.49 1278.24,701.84 1381.39,1655.01 1314.73,1753.41 1381.39,1754.47 1314.73,1803.14 1381.39,1804.2 1314.73,1852.87 1381.39,1853.93 1314.73,1902.6 1381.39,1903.66 1314.73,1952.33 1381.39,1953.39 1314.73,2002.06 1381.39,2003.12 758.19,2028.9 797.73,2028.9 837.27,2028.9 1314.73,2051.79 1381.39,2052.85 758.19,2061.05 797.73,2061.05 837.27,2061.05 758.19,2093.19 797.73,2093.19 837.27,2093.19 1314.73,2101.52 1381.39,2102.58 758.19,2125.34 797.73,2125.34 837.27,2125.34 1314.73,2151.25 1381.39,2152.32 819.37,2236.09 880.07,2236.09 1314.73,2250.72 1381.39,2251.78 819.37,2285.83 880.07,2285.82 1314.73,2300.45 1381.39,2301.51 819.37,2335.56 880.07,2335.56 1314.73,2350.18 1381.39,2351.24 819.37,2385.29 880.07,2385.29 1314.73,2399.91 1381.39,2400.97 819.37,2435.02 880.07,2435.02 1422.93,2456.79 1323.72,2465.51 819.37,2484.75 880.07,2484.75 1467.37,2499.64 1366.58,2515.51 880.07,2534.48 1408.64,2561.79 1497.52,2562.06 880.07,2584.21 2044.37,2649.03 2068.49,2649.03 2092.61,2649.03 879.97,2656.94
GPIO0: C4.2 J3.14 KEY1.1 R13.2 U4.27 | length 2861.8
  Top Layer w10: J3.14 75.93,1503.33 203.41,1375.85 203.41,1220.17 471.55,952.03 U4.27 ; KEY1.1 743.96,1519.7 819.53,1519.7 826.61,1526.79 860.27,1526.79 872.08,1538.6 872.08,1713.16 950.94,1792.02 v1(1008.84,1792.02) ; v1(1206.43,2178.95) 1206.43,2231.39 R13.2
  Bottom Layer w10: v1(754.78,953.44) 754.78,1177.06 676.68,1255.17 676.68,1483.1 713.28,1519.7 v1(783.96,1519.7) ; v1(1008.84,1792.02) 1190.54,1792.02 1206.43,1807.91 v1(1206.43,2178.95)
GPIO1: J3.2 U4.39 | length 769.3
  Top Layer w10: J3.2 115.29,303.33 164,352.03 U4.39
GPIO2: J3.3 U4.38 | length 749.7
  Top Layer w10: J3.3 130.2,403.33 131.5,402.03 U4.38
GPIO3: J1.13 U4.15 | length 1117.1
  Top Layer w10: U4.15 2061.45,1002.42 2177.41,1118.39 2177.41,1288.55 J1.13
GPIO4: J1.4 R31.1 U4.4 U9.1 | length 2051.8
  Top Layer w10: U9.1 R31.1@1419.88,1337.27 ; v1@1422.76,1379.53 v1(1422.84,1379.46) R31.1 ; U4.4 1552.77,452.03 1660.93,560.19 2235.33,560.19 J1.4
  Bottom Layer w10: v1(1422.84,1379.46) 1518.83,1379.46 1715.25,1183.03 1715.25,689.8 1630.13,604.68 v1(1630.13,532.21)
GPIO5: J1.5 R30.1 U4.5 U9.2 | length 1981.1
  Top Layer w10: U9.2 1424.43,1437.27 R30.1 1432.04,1436.54 v1(1458.79,1436.54) ; U4.5 1561.39,502.03 1645.95,586.59 2262.18,586.59 2278.91,603.33 J1.5
  Bottom Layer w10: v1(1458.79,1436.54) 1497.24,1436.54 1737.07,1196.7 1737.07,677.71 1666.24,606.88 v1(1666.24,587.28)
GPIO6: J1.6 R29.1 U4.6 U9.3 | length 2150.3
  Top Layer w10: U9.3 1380.84,1537.27 1429.23,1585.66 v1(1471.91,1585.66) ; U4.6 1565.22,552.03 1625.54,612.36 2201.22,612.36 J1.6
  Bottom Layer w10: v1(1471.91,1585.66) 1511.64,1585.66 1554.97,1542.33 1554.97,1424.34 1758.2,1221.11 1758.2,659.87 v1(1710.69,612.36)
GPIO7: J1.7 U4.7 | length 865.2
  Top Layer w10: U4.7 1571.64,602.03 1609.01,639.4 2128.26,639.4 J1.7
GPIO8: J1.12 U4.12 | length 1069.6
  Top Layer w10: U4.12 2013,852.03 2199.41,1038.44 2199.41,1210.55 J1.12
GPIO9: J1.15 U4.17 | length 1399.1
  Top Layer w10: U4.17 1340.83,1065.48 1367.49,1092.14 2057.3,1092.14 2132.04,1166.88 2132.04,1443.18 J1.15
GPIO10: J1.16 U4.18 | length 1533.7
  Top Layer w10: U4.18 1290.83,1080.98 1323.29,1113.43 2036.98,1113.43 2111.42,1187.88 2111.42,1522.56 J1.16
GPIO11: J1.17 U4.19 | length 1666.1
  Top Layer w10: U4.19 1240.83,1091.51 1285.11,1135.79 2018.64,1135.79 2090.34,1207.49 2090.34,1601.48 J1.17
GPIO12: J1.18 U4.20 | length 1811.8
  Top Layer w10: U4.20 1190.83,1109.41 1240.58,1159.15 2003.62,1159.15 2067.43,1222.96 2067.43,1691.73 2279.02,1903.33 J1.18
GPIO13: J1.19 U4.21 | length 1936.9
  Top Layer w10: U4.21 1140.83,1119.36 1201.96,1180.49 1985.65,1180.49 2044.51,1239.35 2044.51,1755.65 J1.19
GPIO14: J1.20 U4.22 | length 2067.4
  Top Layer w10: U4.22 1090.83,1122.55 1174.55,1206.27 1974.9,1206.27 2022.06,1253.43 2022.06,1833.2 J1.20
GPIO15: J1.8 U4.8 | length 886
  Top Layer w10: U4.8 1577.5,652.03 1595.56,670.1 2058.96,670.1 J1.8
GPIO16: J1.9 U4.9 | length 906.7
  Top Layer w10: U4.9 1990.89,702.03 J1.9
GPIO17: J1.10 U4.10 U6.7 | length 2171.4
  Top Layer w10: U4.10 2003.44,752.03 2241.11,989.7 2241.11,1052.25 J1.10 ; U6.7 v1(1993.95,2127.07) v1@1994.29,2126.72
  Bottom Layer w10: v1(1993.95,2127.07) 1993.95,2077.13 2194.03,1877.05 2194.03,1201.48 J1.10
GPIO18: J1.11 R3.1 U4.11 | length 2316.4
  Top Layer w10: U4.11 2009.19,802.03 2220.49,1013.33 2220.49,1131.63 J1.11 ; R3.1 1690.97,2000.59 v1(2119.17,2000.59)
  Bottom Layer w10: v1(2119.17,2000.59) 2119.94,2000.59 2221.7,1898.83 2221.7,1273.82 J1.11
GPIO21: J3.18 U4.23 | length 1602.6
  Top Layer w10: J3.18 321.36,1654.17 321.36,1296.32 461.05,1156.63 973.95,1156.63 1040.83,1089.75 U4.23
GPIO35: J3.13 U4.28 | length 1015.8
  Top Layer w10: J3.13 172.18,1303.35 172.18,1202.64 472.79,902.03 U4.28
GPIO36: J3.12 U4.29 | length 966.2
  Top Layer w10: J3.12 143.79,1231.74 143.79,1180.33 472.09,852.03 U4.29
GPIO37: J3.11 U4.30 | length 915.4
  Top Layer w10: J3.11 473.5,802.03 U4.30
GPIO38: J3.10 R17.1 U4.31 | length 1820.1
  Top Layer w10: J3.10 124.04,1051.49 423.5,752.03 U4.31 ; v1(317.33,1733.49) 439.71,1733.49 R17.1
  Bottom Layer w10: J3.10 82.94,1092.59 160.63,1092.59 211.02,1142.98 211.02,1627.17 v1(317.33,1733.49)
GPIO39: J3.9 U4.32 | length 873.9
  Top Layer w10: J3.9 373.5,702.03 U4.32
GPIO40: J3.8 U4.33 | length 853.2
  Top Layer w10: J3.8 323.5,652.03 U4.33
GPIO41: J3.7 U4.34 | length 832.5
  Top Layer w10: J3.7 273.5,602.03 U4.34
GPIO42: J3.6 U4.35 | length 811.8
  Top Layer w10: J3.6 81.59,703.33 232.89,552.03 U4.35
GPIO45: J3.15 U4.26 | length 1187.4
  Top Layer w10: J3.15 232.85,1442.67 232.85,1238.84 470.45,1001.24 U4.26
GPIO46: J1.14 U4.16 | length 1260.5
  Top Layer w10: U4.16 1390.7,1002.55 1390.7,1045.4 1411.99,1066.69 2071.15,1066.69 2154.96,1150.49 2154.96,1366.1 J1.14
GPIO47: J3.17 U4.24 | length 1465.9
  Top Layer w10: J3.17 292.05,1583.48 292.05,1275.73 448.47,1119.3 934.16,1119.3 990.83,1062.63 U4.24
GPIO48: J3.16 U4.25 | length 1331.8
  Top Layer w10: J3.16 262.26,1513.27 262.26,1261.75 456.38,1067.63 919.15,1067.63 940.83,1045.95 U4.25
NetC12_2: C12.2 R18.2 R19.2 U3.8 | length 237.3
  Top Layer w8: C12.2 R18.2 ; R19.2 R18.2 ; U3.8 671,2137.08 650.18,2157.9 R18.2
NetC20_2: C20.2 R6.1 R20.2 U5.4 | length 204.1
  Top Layer w10: C20.2 1837.77,2679.97 R6.1 1985.35,2685.55 U5.4
NetC21_1: C21.1 R15.2 R22.1 U1.2 | length 415
  Top Layer w10: R22.1 1625.95,1724.41 U1.2 1625.95,1579.08 1656.51,1548.52 R15.2 1754.65,1624.04 C21.1
NetC21_2: C21.2 R2.2 U1.1 | length 163.9
  Top Layer w10: U1.1 1734.08,1664.11 C21.2 1755.55,1760.36 R2.2
NetC22_1: C22.1 R27.2 U5.3 | length 157.8
  Top Layer w10: C22.1 2077.82,2762.47 2072.75,2757.41 2072.75,2734 2058.45,2719.7 U5.3
NetC22_2: C22.2 U7.1 | length 157.9
  Top Layer w10: C22.2 1944.32,2795.32 U7.1
NetD5_A: D5.A R11.1 | length 85.9
  Top Layer w15: R11.1 428.03,2179.55 D5.A
NetD6_2: D6.2 R17.2 | length 87
  Top Layer w10: R17.2 449.72,1669.11 D6.2
NetQ1_1: Q1.1 R10.2 | length 82.2
  Top Layer w10: Q1.1 1042.75,1959.49 R10.2
NetQ1_3: Q1.3 R8.1 | length 134.7
  Top Layer w10: Q1.3 1044.45,1859.37 1072.43,1887.35 1118.36,1887.35 R8.1
NetQ2_1: Q2.1 R12.2 | length 87.7
  Top Layer w10: R12.2 1025.82,2327.46 Q2.1
NetQ2_3: Q2.3 R13.1 | length 79.5
  Top Layer w10: Q2.3 1129.14,2292.53 R13.1
NetQ3_1: Q3.1 R2.1 | length 161.9
  Top Layer w8: R2.1 1818.53,1883.97 Q3.1
NetQ3_3: Q3.3 R15.1 R23.1 | length 410.3
  Top Layer w10: R15.1 1795.56,1528.8 1795.56,1590.61 1828.01,1623.06 1913.47,1623.06 ; Q3.3 1913.47,1677.5 1913.47,1623.06 ; R23.1 1913.47,1623.06
NetR3_2: R3.2 R4.1 | length 187
  Top Layer w10: R4.1 1568.7,1886.96 1589.97,1908.24 R3.2
NetR4_2: R4.2 R26.1 U1.3 | length 488.2
  Top Layer w10: R4.2 1575.95,1753.57 U1.3 1575.95,1589.39 v1(1588.11,1577.24) ; R26.1 1835.27,1591.07 v1(1835.67,1591.47)
  Bottom Layer w10: v1(1588.11,1577.24) 1818.82,1577.24 1833.05,1591.47 v1(1835.67,1591.47)
NetR7_1: R7.1 U3.26 | length 93.9
  Top Layer w10: U3.26 949.49,2097.71 974.3,2122.52 R7.1
NetR9_1: R9.1 U3.25 | length 92.4
  Top Layer w10: U3.25 947.65,2078.03 972.68,2053 R9.1@972.68,2052.01
NetR14_1: R14.1 U3.10 | length 196.8
  Top Layer w8: R14.1 617.54,1954.88 664.86,2002.21 664.86,2087.16 675.41,2097.71 U3.10
NetR16_1: R16.1 U3.9 | length 153.4
  Top Layer w8: R16.1 617.54,2023.69 647.66,2053.8 647.66,2099.49 665.57,2117.4 U3.9
NetR21_1: R21.1 U5.6 | length 85.2
  Top Layer w10: R21.1 2058.45,2581.06 U5.6
NetR21_2: R21.2 U6.2 | length 94.2
  Top Layer w10: U6.2 1993.95,2433.75 2020.44,2460.24 R21.2
NetR23_2: R23.2 R26.2 U8.1 | length 190.2
  Top Layer w10: R26.2@1835.27,1486.04 1911.62,1486.04 1912.23,1486.65 U8.1
NetR25_2: R25.2 U5.8 | length 100.4
  Top Layer w10: U5.8 2097.82,2608.08 2098.34,2607.57 2099.21,2607.57 2151.27,2555.5 2151.27,2554.52 2164.58,2541.21 R25.2
NetR27_1: R27.1 U5.1 | length 94.3
  Top Layer w10: U5.1 2097.82,2721.77 2124.2,2748.14 2125.18,2748.14 2138.49,2761.45 R27.1
OTG_D_N: D9.2 J4.2 U4.13 | length 2232
  Top Layer w9: v1(1474.98,2602) 1469.13,2607.86 1469.13,2640.59 D9.2 1481.23,2665.06 1468.9,2677.39 1468.9,2730.15 J4.2 ; U4.13 1544.35,902.03 1562.35,920.03 1594.52,920.03 1611.92,937.43 v1@1611.92,951.1
  Bottom Layer w9: v1(1474.98,2602) 1468.06,2595.08 1468.06,2541.4 1353.44,2426.78 1353.44,1263.64 1373.37,1243.7 1562.47,1243.7 1566.57,1239.6 1580.31,1225.87 1603.72,1202.46 1611.92,1194.25 1611.92,962.96 v1(1617.85,957.03)
OTG_D_P: D10.2 J4.3 U4.14 | length 2206.1
  Top Layer w9: J4.3 1454.9,2730.15 1454.9,2676.47 1443.03,2664.6 D10.2 1455.13,2640.13 1455.13,2608.01 v1(1449.13,2602) ; U4.14 1544.35,952.03 1562.35,934.03 1588.72,934.03 1597.92,943.23 v1@1597.92,951.1
  Bottom Layer w9: v1(1449.13,2602) 1451.96,2599.18 1451.96,2545.1 1339.44,2432.58 1339.44,1257.84 1363.47,1233.8 1367.57,1229.7 1556.67,1229.7 1597.92,1188.46 1597.92,962.96 v1(1591.99,957.03)
REF: C23.1 P1.2 R28.2 U6.3 | length 638
  Top Layer w15: R28.2 1590.2,2313.01 1679.51,2402.31 P1.2 1762.51,2541.82 1915.58,2541.82 1932.52,2524.87 1932.52,2499.89 C23.1 1941.88,2401.25 U6.3
RTS: Q1.2 R12.1 U3.24 | length 426.7
  Top Layer w10: U3.24 919.71,2058.34 928.52,2049.53 v1(928.52,2006.35) 966.26,1968.62 Q1.2 ; R12.1 943.29,2238.44 v3(945.01,2236.72)
  Bottom Layer w10: v1(928.52,2006.35) 955.88,2033.71 955.88,2225.85 v3(945.01,2236.72) v3@943.29,2236.72
U0RXD: J3.5 R7.2 U4.36 | length 2828.4
  Top Layer w10: J3.5 173.5,502.03 U4.36 1055.7,502.03 v1(1084.19,530.51) ; R7.2 1034.93,2122.52 1048.24,2109.21 1049.22,2109.21 1054.46,2103.98 1159.74,2103.98 1189.24,2074.48 1189.24,1347.49 v1(1188.86,1347.11)
  Bottom Layer w10: v1(1084.19,530.51) 1084.19,531.27 1094.13,541.21 1094.13,1252.38 v1(1188.86,1347.11)
U0TXD: J3.4 R9.2 U4.37 | length 2760
  Top Layer w10: J3.4 123.5,452.03 U4.37 823.34,450.04 v1(872.02,450.04) ; R9.2@1033.31,2052.01 1033.31,2053 1046.62,2066.31 1047.6,2066.31 1060.84,2079.54 1147.82,2079.54 1167.82,2059.55 1167.82,1373.98 v1(1147.48,1353.65)
  Bottom Layer w10: v1(872.02,450.04) 959.57,450.04 1066.55,557.01 1066.55,1272.71 v1(1147.48,1353.65)
USB_D_N: D3.2 J2.5 J2.7 U3.5 | length 1609.4
  Top Layer w9: v1(585.63,2755.34) 579.41,2761.57 579.41,2781.73 589.39,2791.71 D3.2 589.39,2816.46 578.51,2827.34 578.51,2865.23 581.35,2868.07 J2.7 581.35,2920.38 578.51,2923.22 578.51,2964.18 582.66,2968.33 598.41,2968.33 603.54,2963.2 603.54,2941.53 v1(600.72,2938.71) ; J2.5 620.72,2851.05 v1(624.11,2847.66) ; v1(775.32,2217.21) 778.34,2214.19 U3.5
  Bottom Layer w9: v1(585.63,2755.34) 579.71,2749.41 579.71,2713.18 619.43,2673.46 828.67,2673.46 858.82,2643.31 858.82,2178.77 837.68,2157.63 797.74,2157.63 793.64,2161.73 781.24,2174.12 781.24,2211.28 v1(775.32,2217.21) ; v1(600.72,2938.71) 606.64,2944.63 606.64,2979.55 621.87,2994.78 651.21,2994.78 668.51,2977.48 668.51,2901.93 653.06,2886.47 636,2886.47 618.18,2868.65 618.18,2853.59 v1(624.11,2847.66)
USB_D_P: D4.2 J2.6 J2.8 U3.4 | length 1564.4
  Top Layer w9: v1(559.78,2755.34) 565.41,2760.97 565.41,2781.73 555.42,2791.71 D4.2 555.42,2816.46 564.51,2825.55 564.51,2865.23 561.67,2868.07 J2.8 561.67,2920.38 564.51,2923.22 564.51,2969.98 576.86,2982.33 604.21,2982.33 620.64,2965.89 620.64,2944.63 v1(626.57,2938.71) ; v1(598.25,2847.66) 601.04,2850.45 J2.6 ; U3.4 798.03,2214.06 v1(801.17,2217.21)
  Bottom Layer w9: v1(559.78,2755.34) 565.71,2749.41 565.71,2707.39 613.63,2659.46 822.87,2659.46 844.82,2637.51 844.82,2184.57 831.88,2171.63 803.54,2171.63 795.24,2179.92 795.24,2211.28 v1(801.17,2217.21) ; v1(598.25,2847.66) 604.18,2853.59 604.18,2874.45 630.2,2900.47 647.26,2900.47 654.51,2907.72 654.51,2971.68 645.41,2980.78 627.67,2980.78 620.64,2973.75 620.64,2944.63 v1(626.57,2938.71)
VBUS: C15.2 D1.1 D2.2 D8.2 J2.2 J2.11 J4.1 R19.1 | length 1045.2
  Top Layer w15: J2.11 496.7,2916.19 507.97,2927.46 507.97,2968.7 ; 673.15,2969.99 673.15,2928.88 685.68,2916.35 J2.2
  Top Layer w20: v2(496.7,2851.33) J2.11 ; v2(555.86,2291.56) 556.91,2290.51 R19.1 ; J2.2@684.85,2895.05 J2.2
  Bottom Layer w20: v2(496.7,2851.33) 496.7,2815.06 507.68,2804.09 ; v2(555.86,2291.56) 555.86,2337.64 507.68,2385.82 507.68,2804.09 ; v2(688.35,2840.95) 651.48,2804.09 507.68,2804.09
VCC_3V3: C1.2 C2.2 C9.2 C10.2 C11.2 D6.3 R11.2 R16.2 R24.1 R29.2 R30.2 R31.2 U2.2 U2.4 U3.6 U3.7 | length 6250.5
  Top Layer w10: U3.7 738.97,2201.31 739.3,2201.31 755.49,2201.31 758.66,2198.15 U3.6
  Top Layer w15: R30.2 1473.53,1493.73 1483.47,1503.68 ; R29.2 1464.83,1645.66 1501.49,1609 1501.49,1521.69 1483.47,1503.68 ; R31.2 1483.47,1503.68
  Top Layer w20: v2(683.84,2269.72) 687.44,2273.31 C11.2 739.3,2272.98 739.3,2201.31 ; v2(1235.77,1718.21) 1403.52,1718.21 1428.6,1693.13 R29.2
  Top Layer w30: R11.2 293.21,2076.6 347.11,2022.7 ; R16.2 347.11,2022.7 ; D6.3 727.58,1669.11 v2(757.22,1698.75) 757.22,1817.68 718.99,1855.91 v2(371.91,1855.91) 347.11,1880.71 347.11,2022.7 ; R24.1 C2.2 1795.96,321.46 1872.5,321.46 C1.2 1876.96,321.76 1876.96,368.8 v2(1878.75,370.6) 1878.13,369.97 1813.65,369.97 v2(1813.02,369.34)
  Bottom Layer w20: v2(757.22,1698.75) 1211.07,1698.75 1230.53,1718.21 v2(1235.77,1718.21)
  Bottom Layer w30: v2(291.26,2117.08) 531.05,2117.08 683.69,2269.72 v2(683.84,2269.72) ; v2(371.91,1855.91) 371.91,473.45 476.02,369.34 v2(1813.02,369.34) 1813.65,369.97 1878.13,369.97 v2(1878.75,370.6)
VCC_5V: C3.2 C7.2 C8.2 C17.2 C18.2 C19.2 D1.2 J1.21 Q3.2 R1.2 R20.1 R25.1 R28.1 U1.8 U2.3 U5.7 U6.1 | length 4695.2
  Top Layer w10: U5.7 2078.13,2587.23 2083.85,2581.51 2083.85,2555.42 C18.2
  Top Layer w20: C3.2 1048.15,2626.93 1265.8,2409.28 1265.8,2228.23 1288.97,2205.06 1612.63,2205.06 R28.1 2042.19,2282.63 ; R1.2 1463.27,1759.62 1510.22,1759.62 v2(1510.97,1758.87) ; U1.8 1675.95,1349.71 1677.5,1348.15 1736.26,1348.15 v2(1737.14,1347.27) ; R20.1 1907.62,2619.08 1907.62,2578.84 v2(1907.88,2578.58) ; 2043.95,2284.4 2042.19,2282.63 ; U6.1 v2@2121.03,2399.17 ; C18.2 2102.18,2543.97 R25.1 2165.57,2415.72 2149.02,2399.17 v2@2121.03,2399.17 ; J1.21 2220.59,2203.33 2196.87,2227.04 2196.87,2316.43 2180.07,2333.23 C19.2 ; 2042.19,2282.63 2051.19,2282.63 2101.79,2333.23 C19.2 ; v2@2121.03,2399.17 2123.44,2396.76 C19.2
  Bottom Layer w20: v2(1510.97,1758.87) 1747.89,1758.87 1780.47,1791.45 1984.91,1791.45 1988.33,1788.02 ; R28.1 1988.33,1984.5 1988.33,1551.62 1875.59,1438.88 1782.07,1438.88 1737.14,1393.95 v2(1737.14,1347.27) ; v2(1907.88,2578.58) 1907.88,2518.74 1934.38,2492.24 2089.05,2492.24 2122.23,2459.06 v2@2122.23,2397.97
  other v2: 2122.23,2399.17
pads on no net: D6.4 J2.3 J2.4 J2.9 J2.10 J3.19 J3.20 U1.5 U1.6 U1.7 U3.1 U3.2 U3.11 U3.12 U3.13 U3.14 U3.15 U3.16 U3.17 U3.18 U3.19 U3.20 U3.21 U3.22 U3.23 U3.27 U5.2 U6.8 U8.3 U9.4 U9.5

## Polygon pours and split planes (outlines as drawn)
GND on Top Layer "NONET_L-01_P-001" (solid, remove dead copper, pour order 6): 43.69,128.25 13.02,158.92 13.02,3046.96 95.13,3129.07 2249.68,3129.07 2346.02,3032.73 2346.02,147.96 2327.41,129.35 1775.51,129.35 1652.9,251.96 418.38,251.96 294.67,128.25
VCC_3V3 on Top Layer "NONET_L-01_P-001" (solid, remove dead copper, pour order 4): 237.74,2143.12 224.88,2155.99 224.88,2610.99 237.64,2623.76 349.16,2623.76 408.27,2564.64 563.45,2564.64 575.55,2552.55 575.55,2508.88 567.48,2500.82 447.24,2500.82 428.43,2482.01 428.43,2435.66 414.99,2422.23 348.42,2422.23 323.63,2397.44 323.63,2148.81 317.94,2143.12
VCC_5V on Top Layer "NONET_L-01_P-001" (solid, remove dead copper, pour order 3): 465.08,2573.35 451.57,2586.86 451.57,2654.45 474.51,2677.39 579.58,2677.39 599.19,2657.78 846.5,2657.78 861.76,2642.53 861.76,2506.35 843.78,2488.37 618.8,2488.37 601.92,2505.26 601.92,2557.55 586.12,2573.35
VBUS on Top Layer "NONET_L-01_P-001" (solid, remove dead copper, pour order 2): 489.47,2876.25 484.89,2880.83 484.89,2913.85 500.4,2929.36 500.4,3009.34 522.64,3031.58 727.3,3031.58 1585.58,3031.58 1638.44,2978.72 1638.44,2836.08 1664.36,2810.15 1664.36,2762.79 1640.05,2738.48 1568.76,2738.48 1558,2749.24 1558,2924.62 1523.12,2959.5 534.68,2959.5 522.38,2947.21 522.38,2933.15 508.51,2919.28 508.51,2887.37 497.39,2876.25
VBUS on Top Layer "NONET_L-01_P-001" (solid, remove dead copper, pour order 1): 671.77,2698.79 671.77,2913.78 674.89,2916.9 696.47,2916.9 701.72,2911.64 701.72,2853.03 726.6,2828.15 726.6,2700.63 717.94,2691.97 678.6,2691.97
VBUS on Top Layer "NONET_L-01_P-001" (solid, remove dead copper, pour order 0): 1573.4,2528.08 1559.85,2541.62 1559.85,2621.57 1579.18,2640.89 1579.18,2697.84 1558,2719.02 1558,2799.97 1571.18,2813.15 1653.54,2813.15 1664.36,2802.32 1664.36,2762.79 1642.24,2740.67 1642.24,2539.23 1631.09,2528.08
GND on Bottom Layer "NONET_L-01_P-001" (solid, remove dead copper, pour order 5): 43.69,128.25 13.02,158.92 13.02,3046.96 95.13,3129.07 2249.68,3129.07 2346.02,3032.73 2346.02,147.96 2327.41,129.35 1775.51,129.35 1652.9,251.96 418.38,251.96 294.67,128.25

## Other copper
Top Layer:
  rectangle net VBUS: 673.87,2834.1 696.35,2894.22

## Silkscreen, mask and mechanical layers (free items; w line width, h text height)
Top Overlay:
  text "UART" at 807.15,2890.88 h60
  text "OTG" at 1200.04,2656.63 h60
Mechanical 1:
  the board outline again, w6

## Dimensions
0,3149.61 to 0,0 on Mechanical 1
0,3149.61 to 2362.2,3149.61 on Mechanical 1

## Text inside footprints (layer, text, board x,y; h text height)
U9: Top Overlay "ON" at 1056.38,1317.37 h30 r90